# EAGLE board ESP8266MDL (EAGLE 7.7.0)
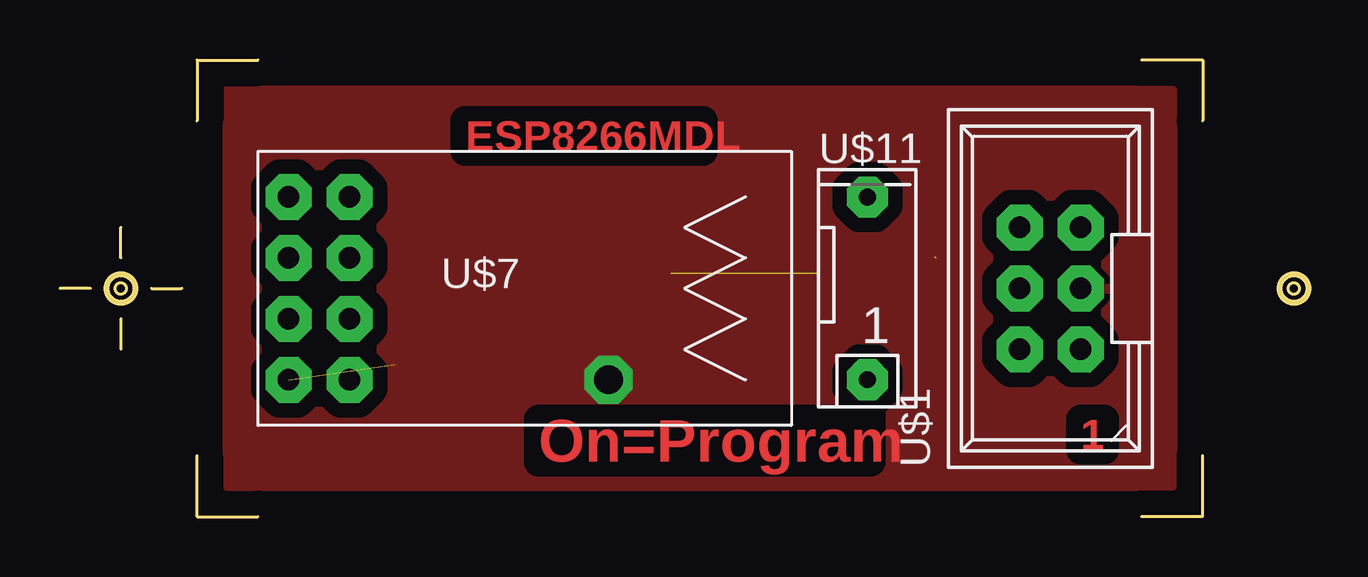
[diagram p0: board, top side]
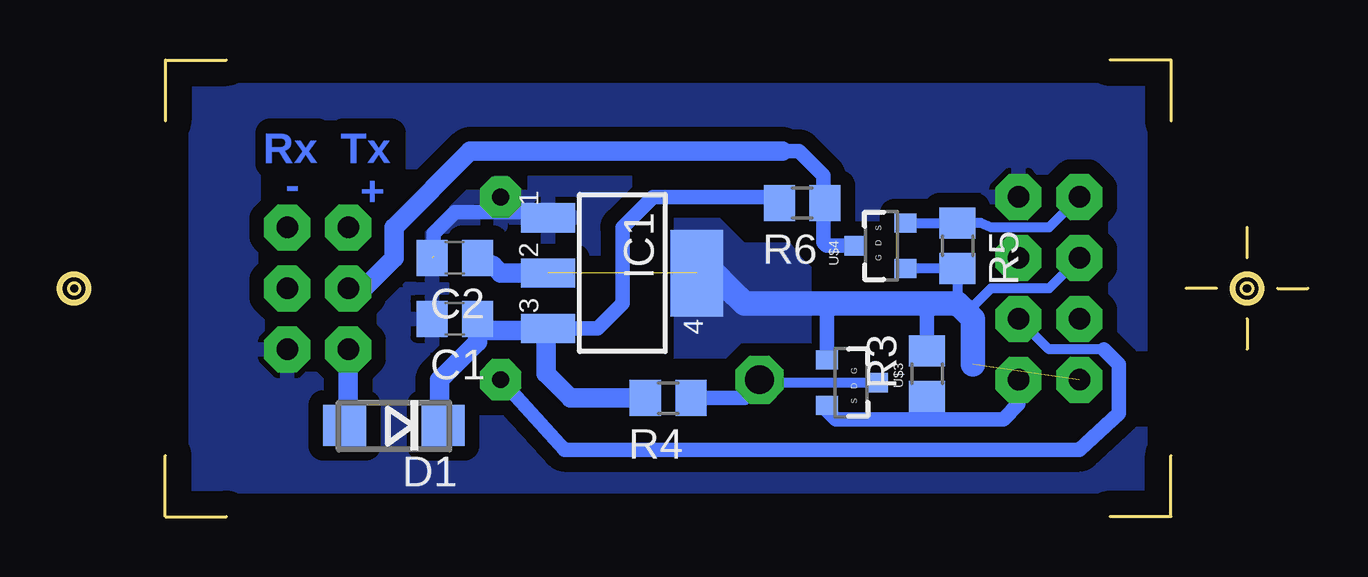
[diagram p1: board, bottom side, seen from below]

Size 52.02 x 19.05 mm. Coordinates in mm from the lower left corner, seen from the top.
Copper layers (1*16): Top 0.035mm / dielectric 1.5mm / Bottom 0.035mm
Design rules "default *": minimum track width 10mil, minimum drill 24mil, track to track 12mil, track to pad 12mil, pad to pad 8mil, via to via 8mil, smd to smd 8mil, copper to edge 40mil, drill to drill 8mil, minimum pad ring 20mil, minimum via ring 8mil, stop-mask expansion 4mil, vias tented up to drill 0mil, thermal gap 10mil

## Footprints (pad centres in the part's own frame; a part is rotated, then mirrored left to right if it is on the bottom)
C0805 = smd 1.3 x 1.5: 1 -0.95,0; 2 0.95,0
DO214AC = smd 1.8 x 1.7: A 2.05,0; C -2.05,0
SOT223 = smd 1.219 x 2.235: 1 -2.311,-3.099; 2 0,-3.099; 3 2.311,-3.099 | smd 3.6 x 2.2: 4 0,3.099
R0805 = smd 1.3 x 1.5: 1 -0.95,0; 2 0.95,0
2X03S = drill 0.9 octagon: 1 -2.54,-1.27; 2 -2.54,1.27; 3 0,-1.27; 4 0,1.27; 5 2.54,-1.27; 6 2.54,1.27
SOT23-FET-SMALL = smd 0.8 x 0.9: D 0,1.1; G -0.95,-1; S 0.95,-1
ESP8266 = drill 0.9 octagon: P$1 -6.35,3.81; P$2 -8.89,3.81; P$3 -6.35,1.27; P$4 -8.89,1.27; P$5 -6.35,-1.27; P$6 -8.89,-1.27; P$7 -6.35,-3.81; P$8 -8.89,-3.81
DP-01 = drill 0.7 octagon: P$1 0,3.81; P$2 0,-3.81

## Placement (x,y rotation side)
C1  4U7  [C0805]  35.56,8.26 180 bottom
C2  4u7  [C0805]  35.56,10.79 180 bottom
D1  SS16  [DO214AC]  38.1,3.81 180 bottom
IC1  AMS-1117-3V3  [SOT223]  28.57,10.16 270 bottom
R3  10k  [R0805]  15.88,5.97 90 bottom
R4  10k  [R0805]  26.67,4.95 180 bottom
R5  10k  [R0805]  14.61,11.3 270 bottom
R6  10k  [R0805]  21.08,13.08 180 bottom
U$1  PINHD-2X3S  [2X03S]  41.27,9.53 90 top
U$2  MARKER  [MARKER]  5.71,19.05 0 top
U$3  2N7002-S  [SOT23-FET-SMALL]  19.05,5.59 270 bottom
U$4  2N7002-S  [SOT23-FET-SMALL]  17.78,11.3 90 bottom
U$5  MARKER  [MARKER]  47.62,19.05 270 top
U$6  MARKERDUAL-50  [MARKER50]  2.54,9.53 0 top
U$7  ESP8266  [ESP8266]  18.41,9.53 0 top
U$8  MARKER  [MARKER]  47.62,0 180 top
U$9  MARKER  [MARKER]  5.71,0 90 top
U$11  DP01-DIL  [DP-01]  33.66,9.53 0 top

## Library data of the parts
C1 C2 R3-R6 = rcl
D1 U$1-U$9 U$11 = MyLib
IC1 = v-reg-3

## Nets
+3V3: C2.1 IC1.2 IC1.4 R3.2 R5.2 U$3.G U$4.G U$7.P$4 U$7.P$8
+5V: D1.A U$1.2
GND: C1.2 C2.2 IC1.1 U$1.1 U$7.P$1 U$11.P$1
GPIO0: U$7.P$5 U$11.P$2
GPIO2: U$7.P$3
RESET: U$7.P$6
RXD_H: R4.1 U$1.3 U$3.D
RXD_L: R3.1 U$3.S U$7.P$7
TXD_H: R6.1 U$1.4 U$4.D
TXD_L: R5.1 U$4.S U$7.P$2
VCC: C1.1 D1.C IC1.3 R4.2 R6.2

## Tracks (layer width: path | path; a pad name or v marks a point on that pad's centre or on a via)
+3V3  (2 unrouted)
  Bottom 0.406: U$7.P$4 10.79,9.53 13.21,9.53 14.22,8.51 | U$4.G R5.2 14.61,8.89 | 20.05,8.62 19.68,8.89
  Bottom 0.61: U$3.G 20.05,8.62 | R3.2 15.88,8.89
  Bottom 0.813: IC1.2 33.66,10.16 33.98,10.48 C2.1
  Bottom 1.016: IC1.4 24.13,9.53 | 24.13,9.53 24.77,10.16 | 24.13,9.53 23.5,8.89 19.68,8.89 15.88,8.89 14.61,8.89 14.22,8.51 13.97,8.26 13.97,6.35
  pour Bottom (isolate 0.254, no thermals): 26.42,12.45 24.51,12.45 23.5,11.43 21.59,11.43 21.08,10.79 20.7,10.41 20.7,7.24 23.62,7.24 24.26,6.6 26.42,6.6
+5V
  Bottom 0.813: U$1.2 40.01,4.3 D1.A
GND  (1 unrouted)
  Bottom 0.61: IC1.1 31.9,12.7 33.66,12.7 | 33.66,12.7 35.56,12.7 36.45,11.81 36.45,10.86 | U$11.P$1 33.66,12.7
  pour Bottom (isolate 0.61, rank 2): 6.99,1.27 6.99,17.78 46.35,17.78 46.35,1.27
GPIO0
  Bottom 0.406: 8.51,6.98 10.79,6.98 U$7.P$5
  Bottom 0.61: 8.51,6.98 7.87,6.35 7.87,4.32 9.53,2.79 30.99,2.79 33.4,5.46 U$11.P$2
RXD_H  (via drill 1.2 pad 2)
  Bottom 0.406: U$3.D 22.23,5.59 | 22.23,5.59 22.86,5.59 | v22.86,5.71 22.23,5.71 22.23,5.59
  Bottom 0.61: 22.86,5.59 23.5,4.95 R4.1
  pour Top (isolate 0.61): 6.99,17.78 46.35,17.78 46.35,1.27 6.99,1.27
RXD_L
  Bottom 0.406: R3.1 15.88,4.06
  Bottom 0.61: U$3.S 20.05,4.43 19.68,4.06 15.88,4.06 12.7,4.06 12.07,4.7 U$7.P$7
TXD_H
  Bottom 0.406: U$1.4 39.37,9.53
  Bottom 0.61: 21.91,15.24 21.21,15.24 20.19,14.22 20.19,13.14 R6.1 20.19,13.02 20.19,11.43 20.07,11.3 U$4.D
  Bottom 0.813: 39.37,9.53 38.1,10.79 38.1,12.06 34.93,15.24 21.91,15.24
TXD_L
  Bottom 0.406: U$4.S R5.1 13.65,12.25 13.21,12.06 10.79,12.06 U$7.P$2
VCC
  Bottom 0.61: R6.2 22.29,13.33 27.3,13.33 28.57,12.06 28.57,8.89 29.62,7.85 IC1.3
  Bottom 0.813: R4.2 30.73,4.95 31.75,5.97 31.75,7.77 | 31.75,7.77 IC1.3 | 31.75,7.77 34.13,7.77 C1.1 34.61,7.3 36.2,5.71 36.2,3.96 D1.C

## Text on the board
Top: ESP8266MDL | 1 | On=Program
Bottom: Tx | Rx | + | -